# Altium PCB samrtmcu.PcbDoc
Units mm, origin at the board's own origin, x right, y up, seen from the top; angles counter-clockwise.
Board outline 50.28 x 49.91 mm, 4 copper layers (Top Layer, GND_layer, 3.3V_layer, Bottom Layer), stack 0.603 mm thick; 88 components, 43 nets, 255 pads, 84 vias.
Unrouted connection lines stored in the file: 4.
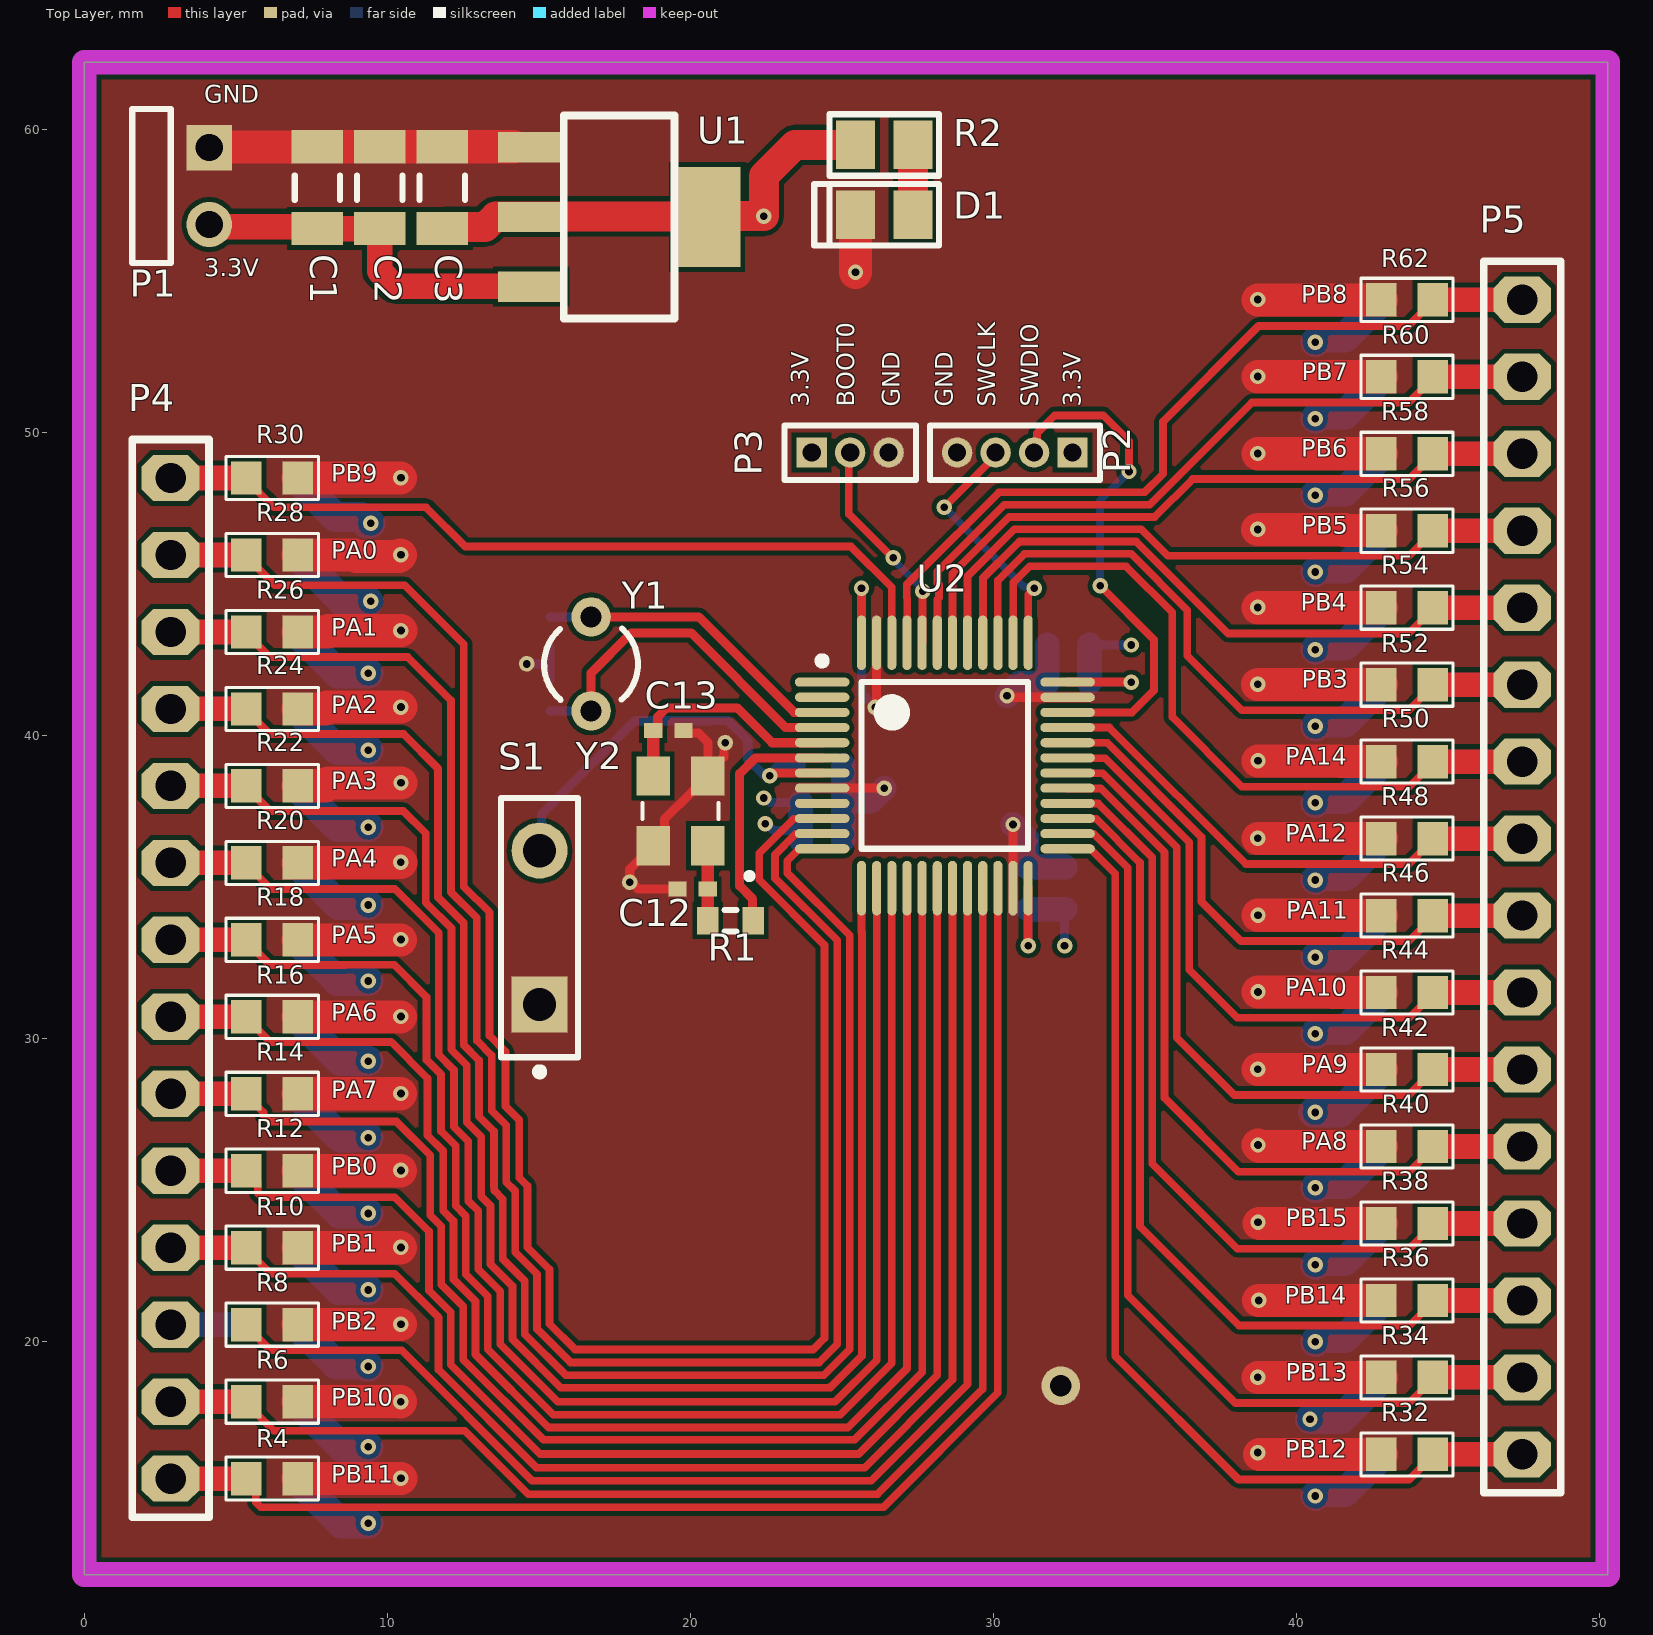
[diagram p0: Top Layer view]
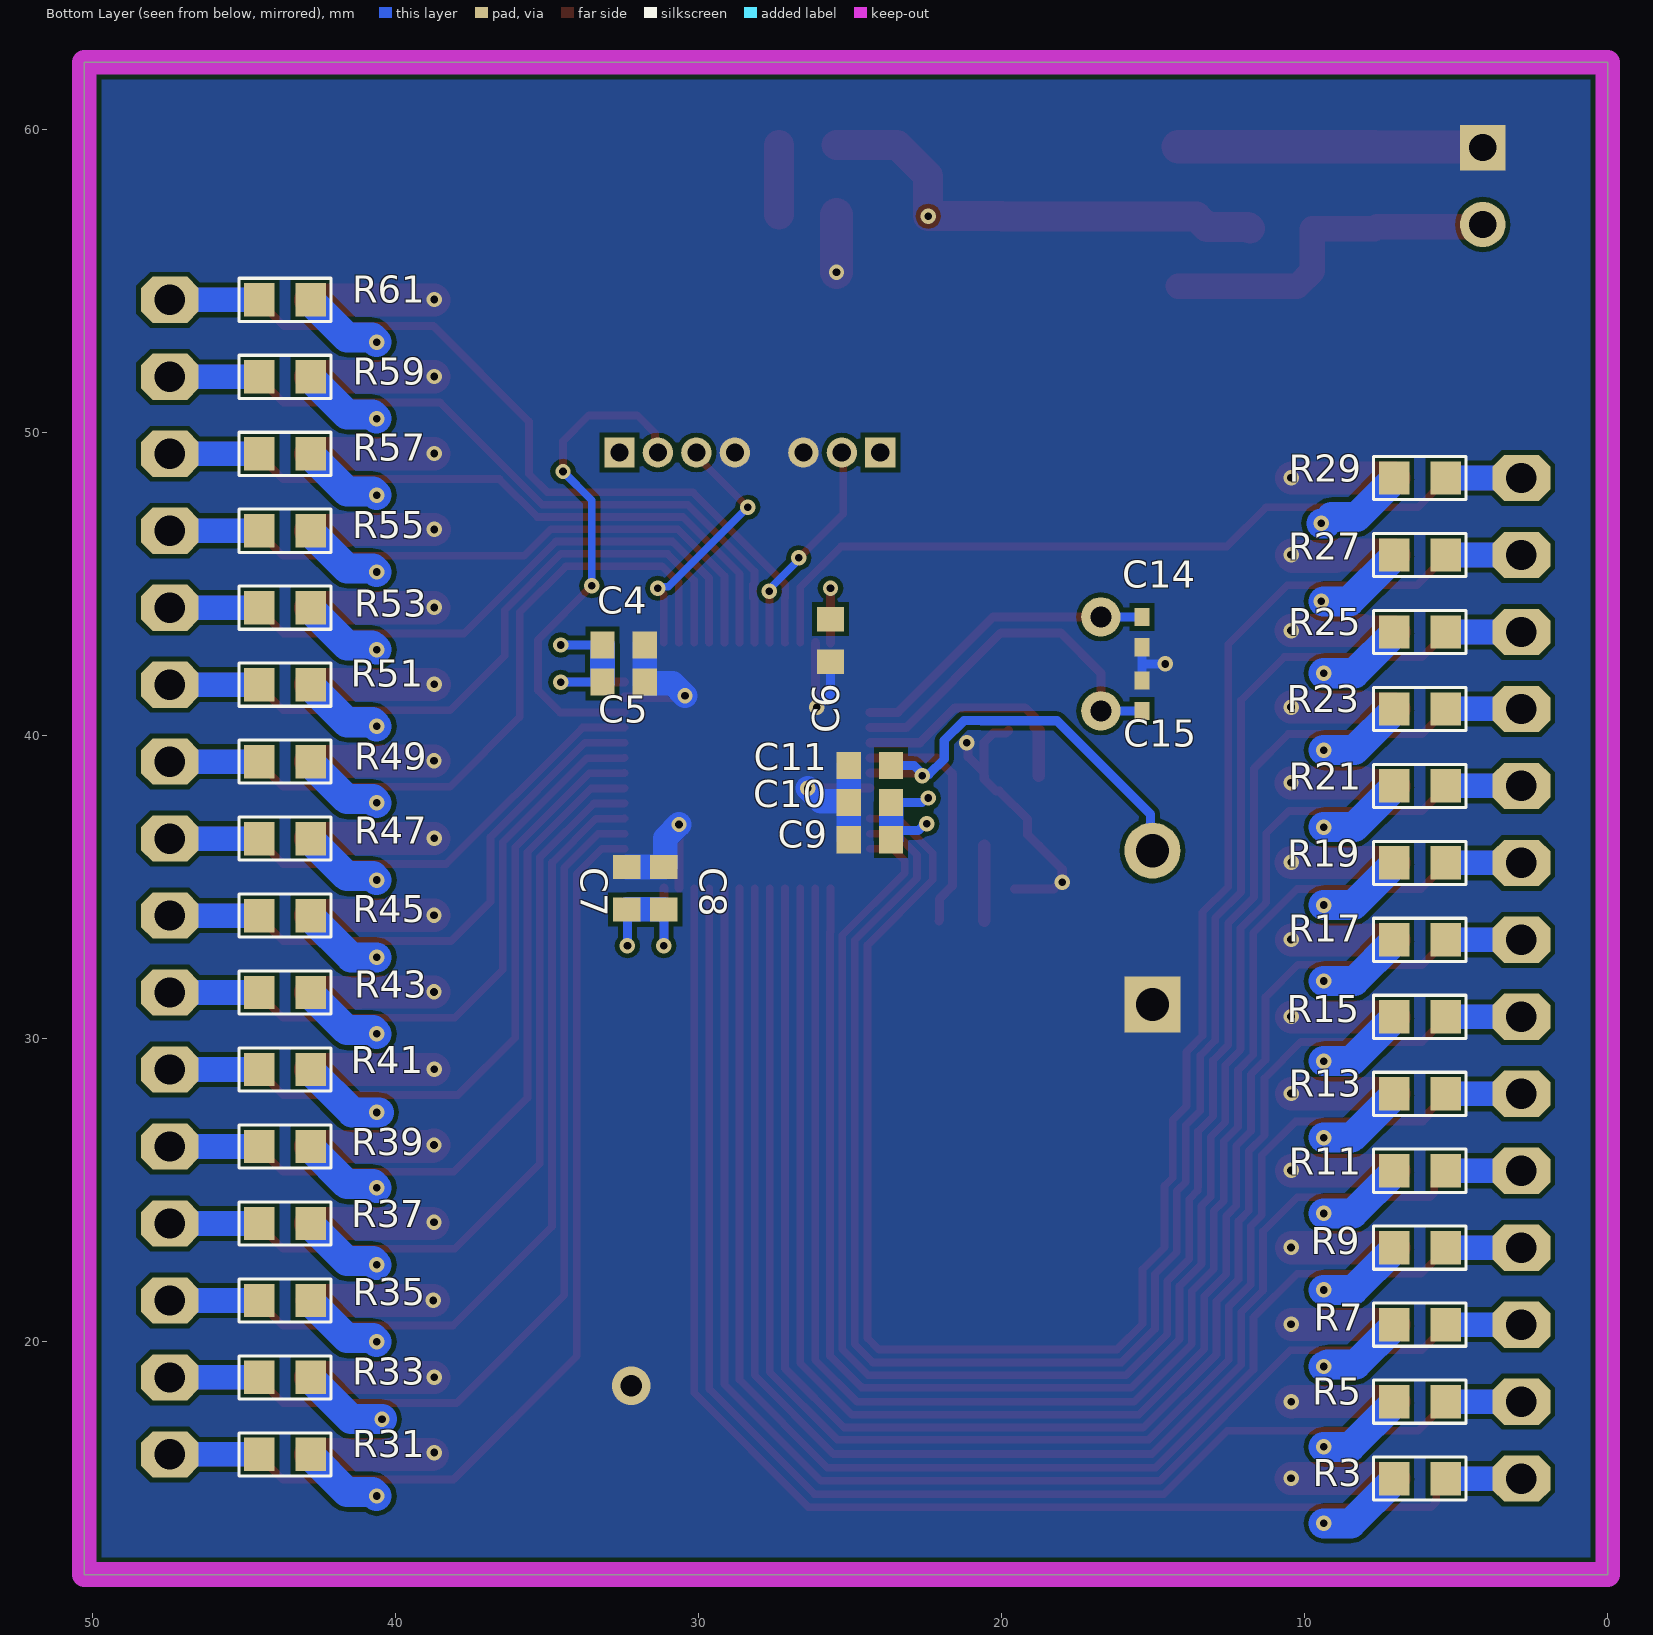
[diagram p1: Bottom Layer view, seen from below]
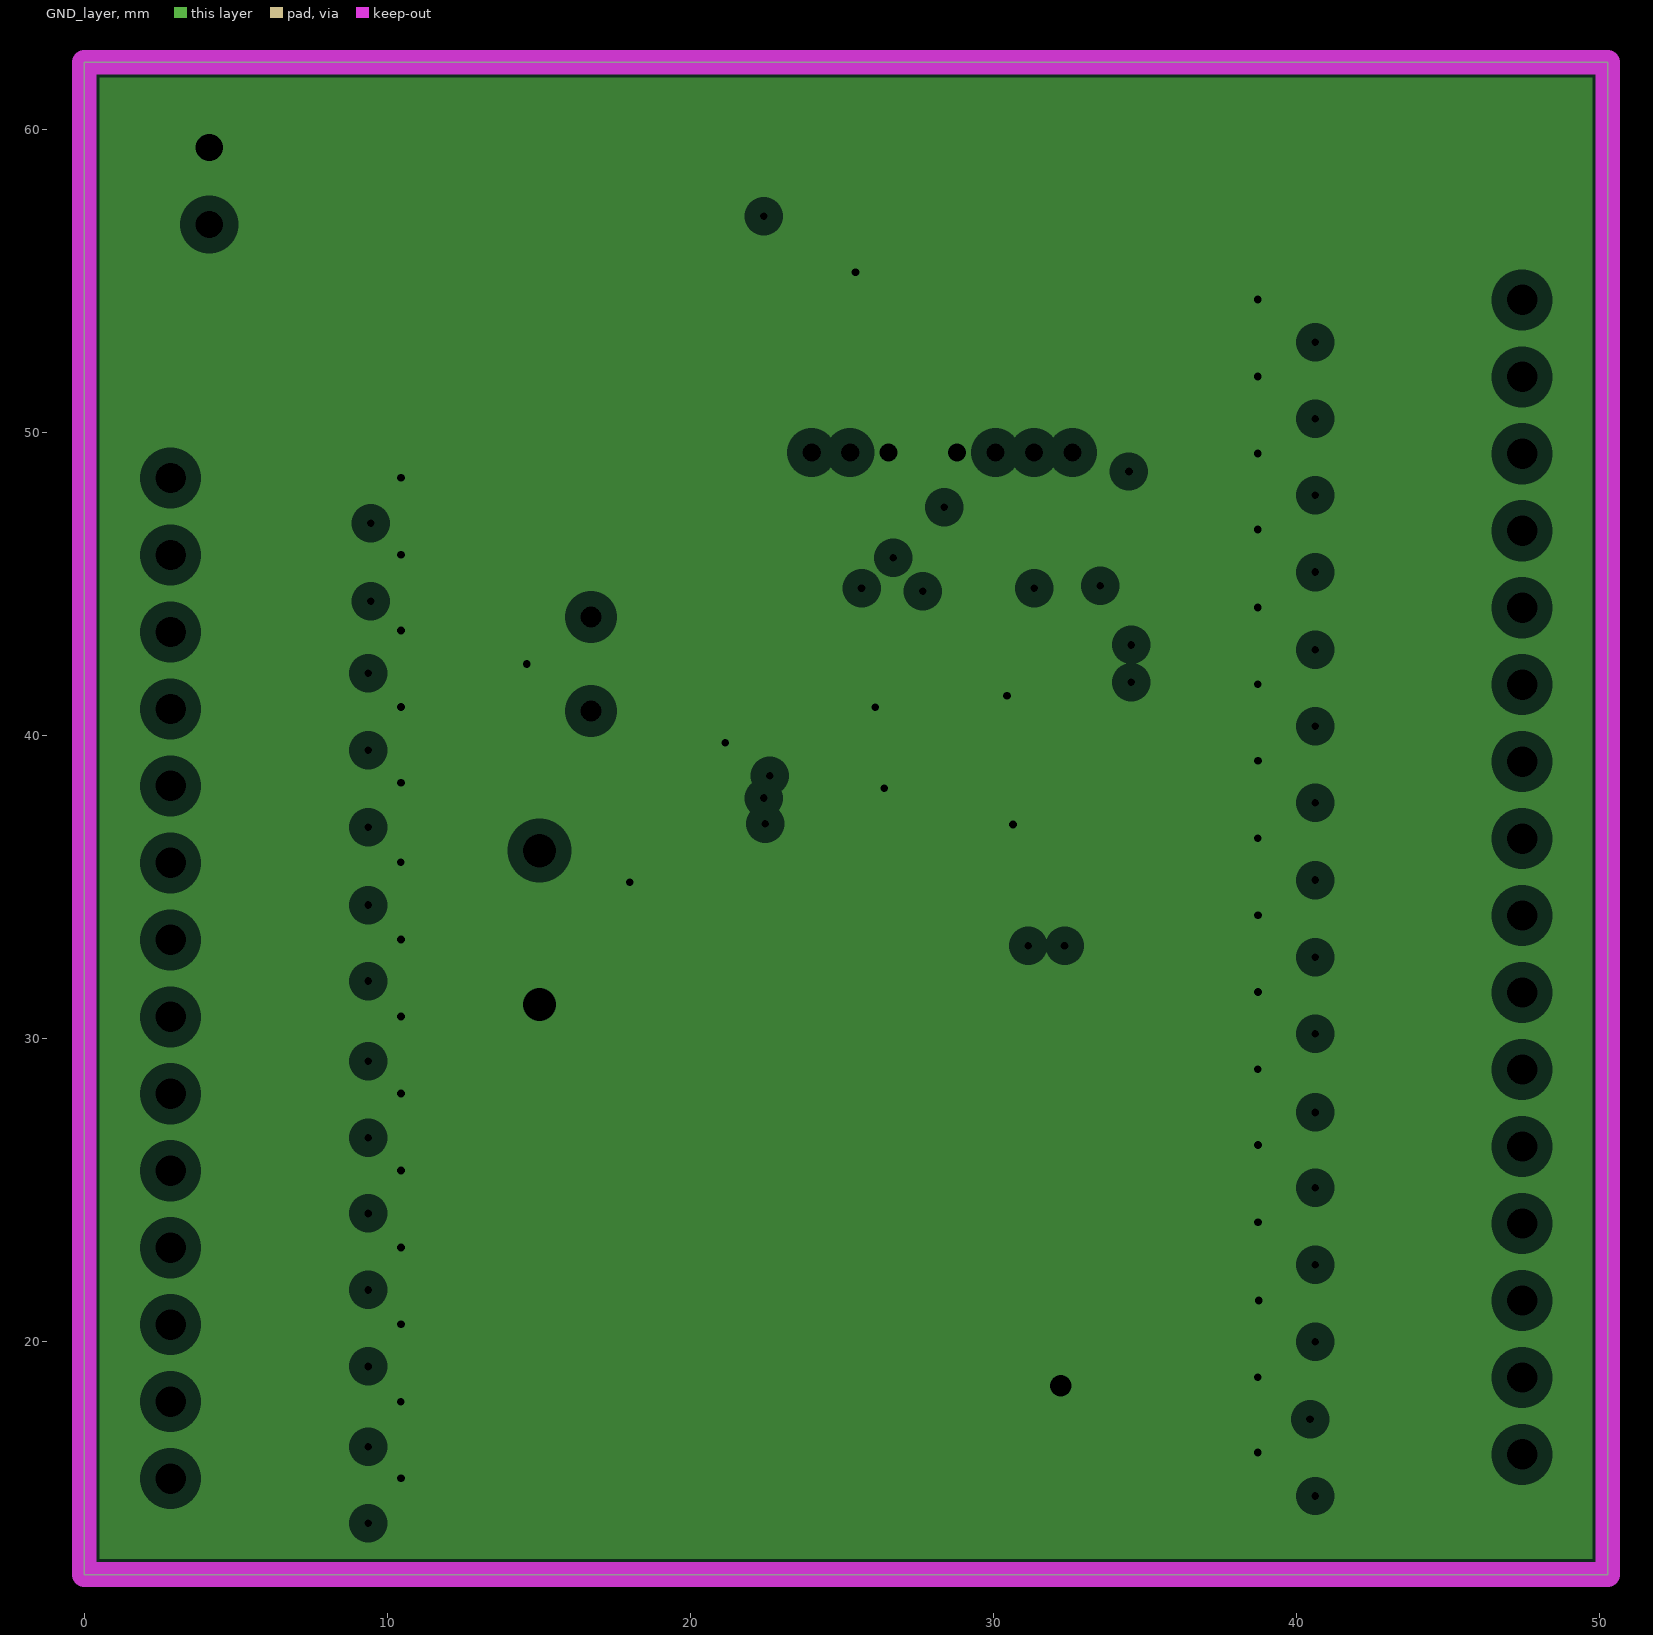
[diagram p2: GND_layer, clearances drawn from the general rule]
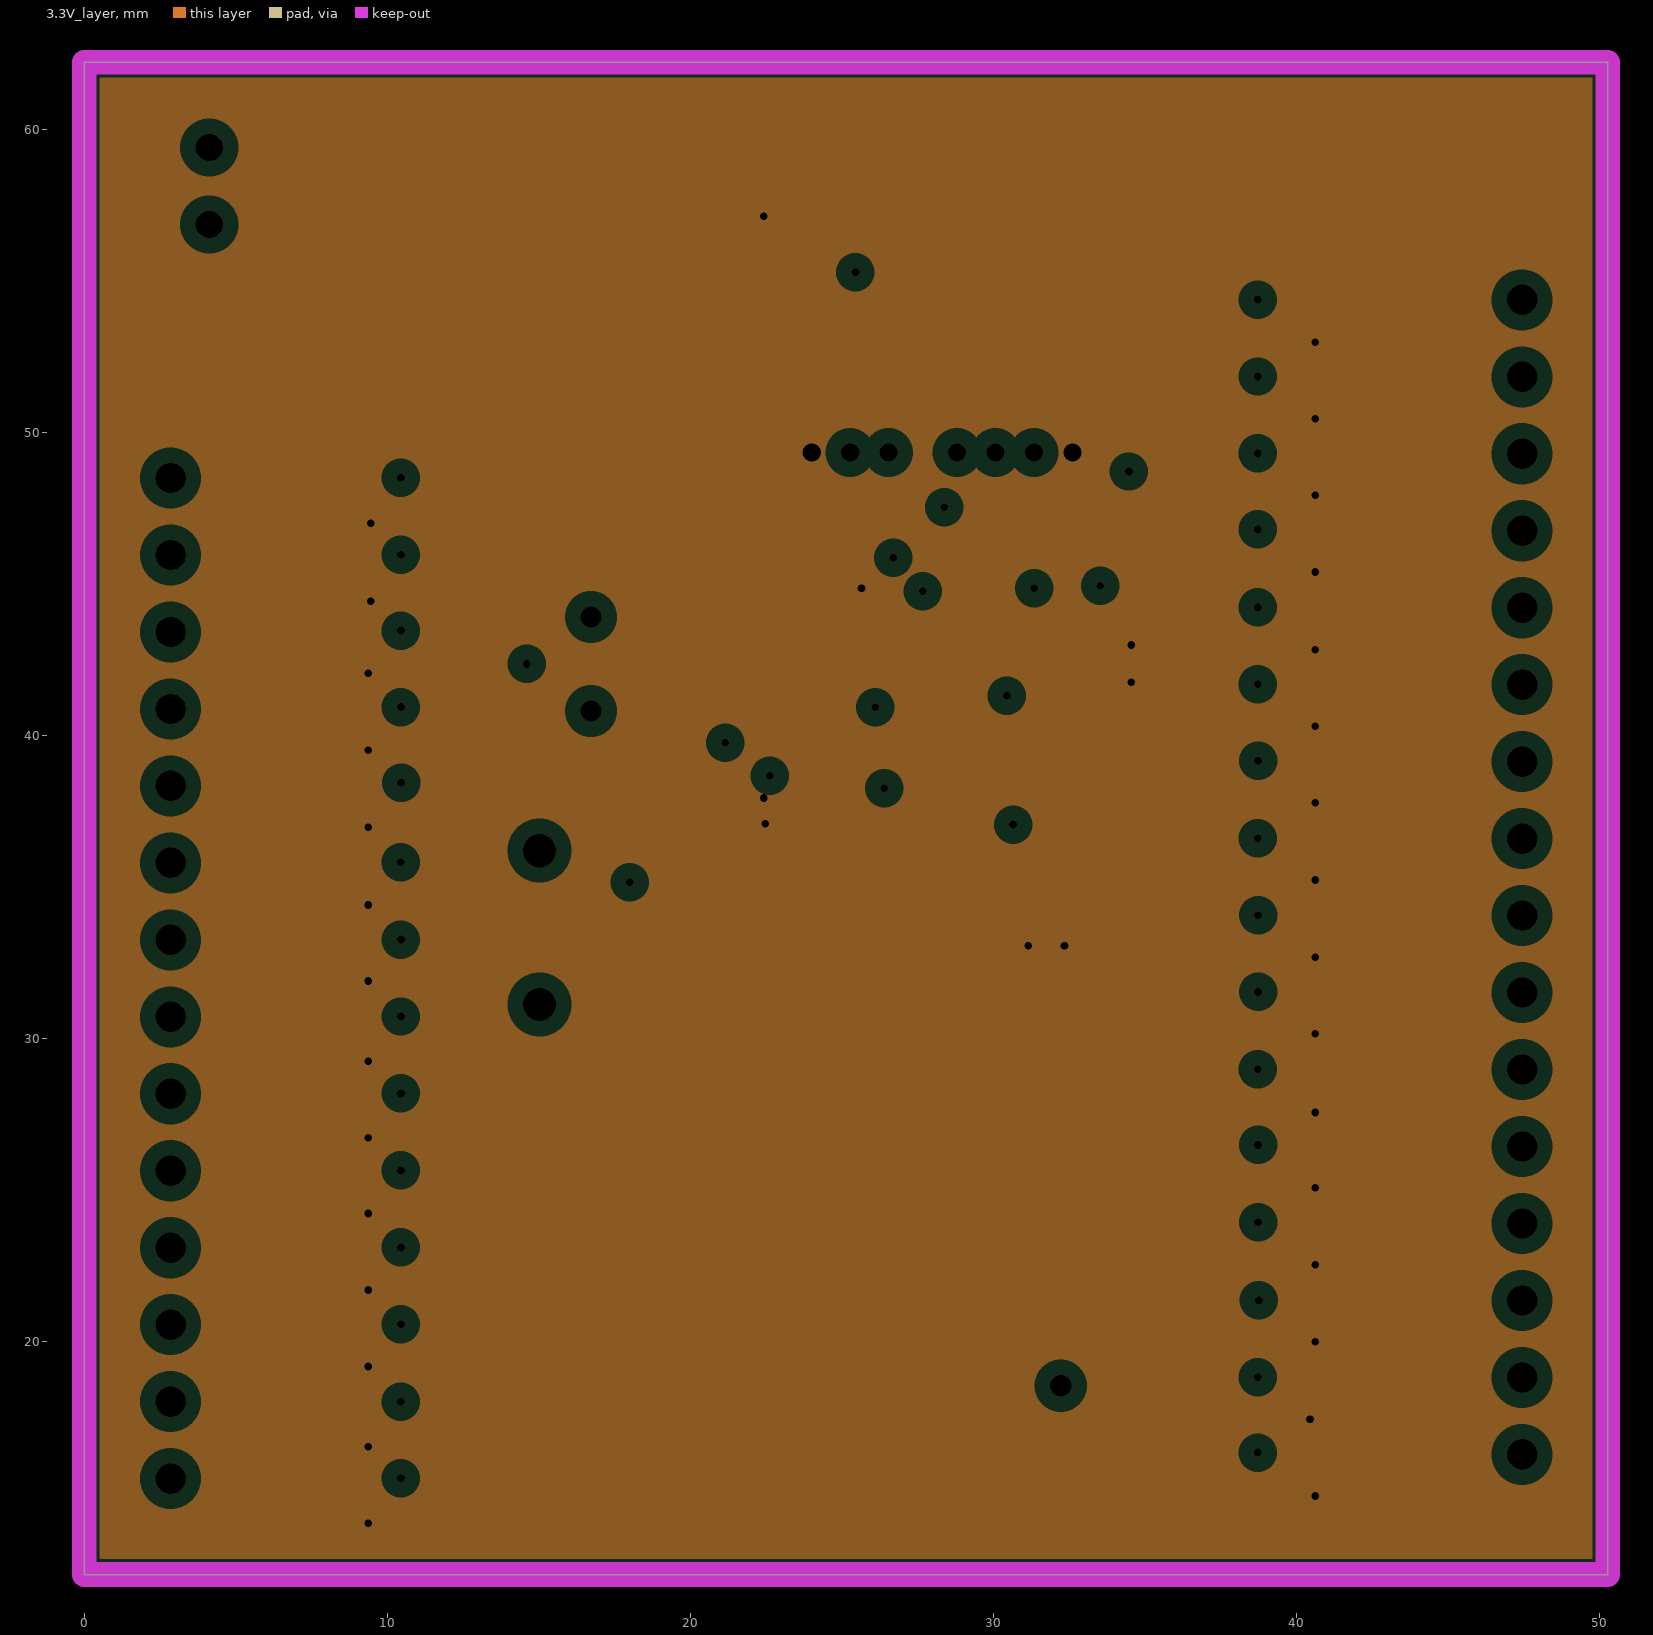
[diagram p3: 3.3V_layer, clearances drawn from the general rule]
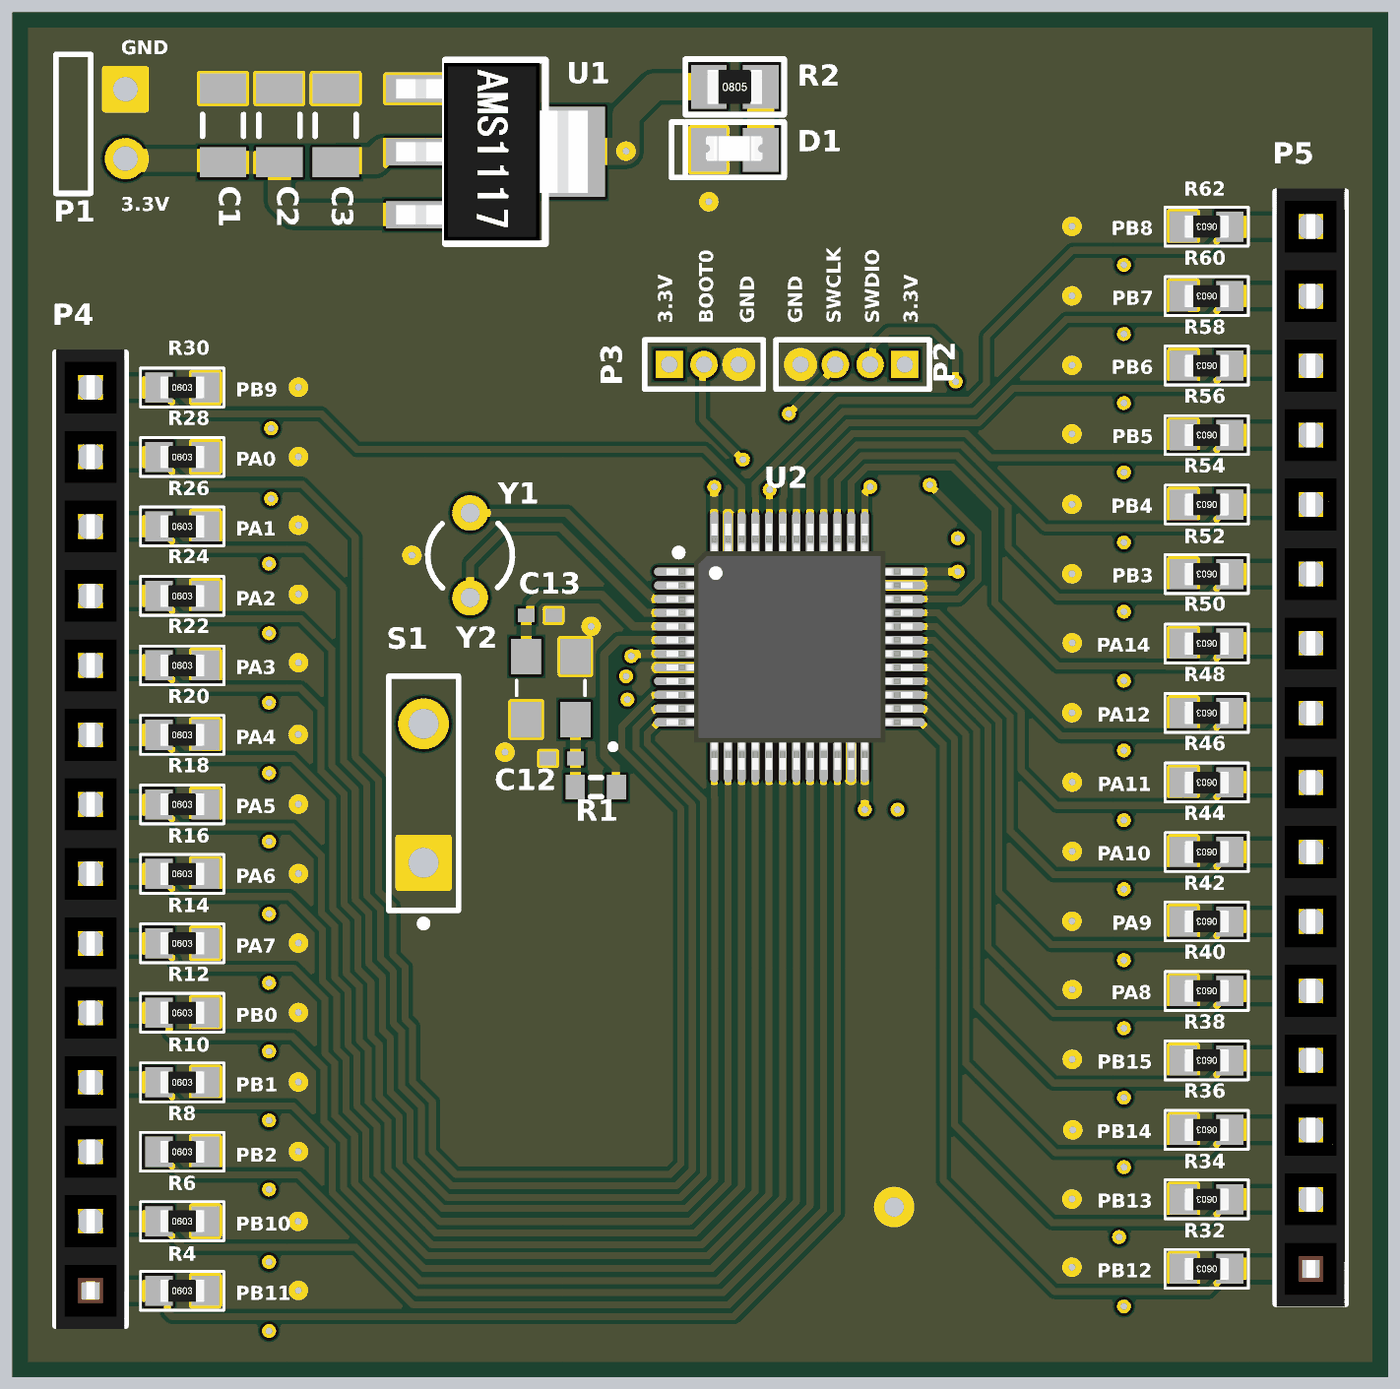
[diagram p4: 3D render of the assembled board from above, using the file's embedded part models]
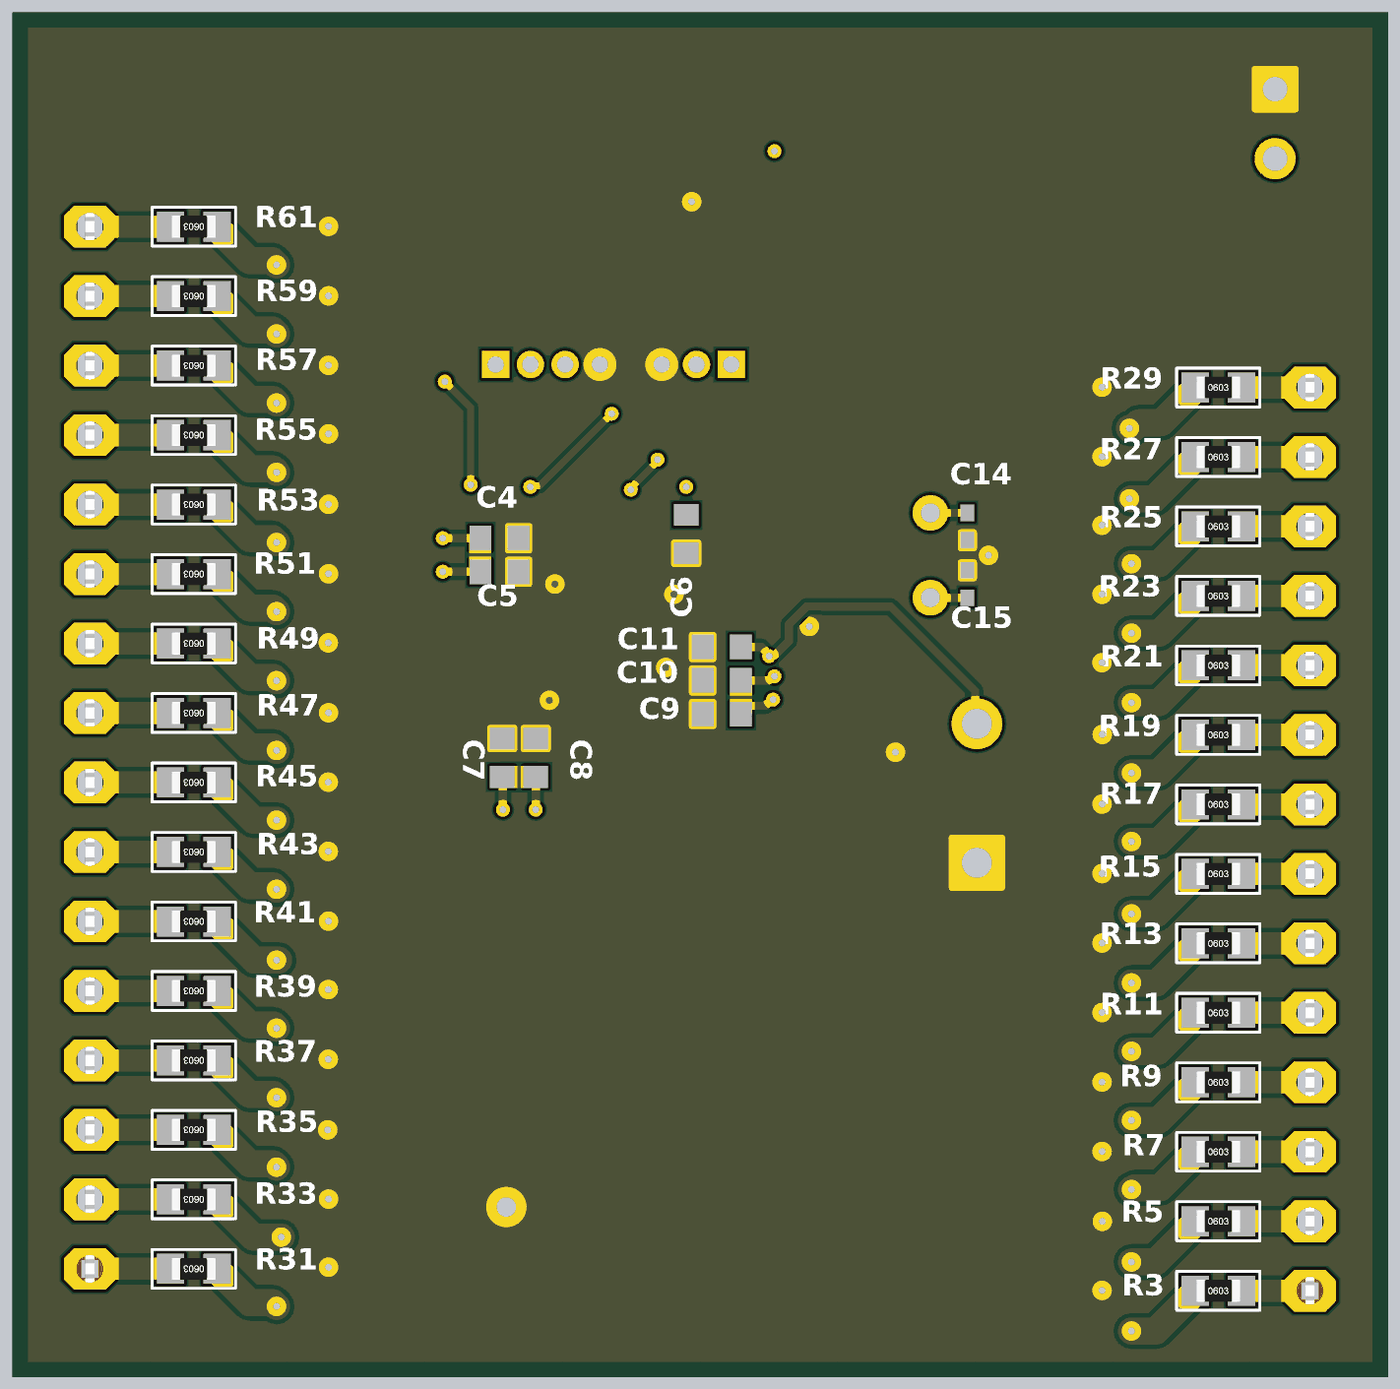
[diagram p5: 3D render of the assembled board from below, using the file's embedded part models]

## Layer stack, top to bottom
Top Solder: solder mask 0.0102, Solder Resist, Dk 3.5
Top Layer: signal copper 0.0356
Dielectric 2: prepreg 0.0711, PP-006, Dk 4.1
GND_layer: plane copper 0.035, net GND
Dielectric 1: dielectric 0.32, FR-4, Dk 4.8
3.3V_layer: plane copper 0.035, net +3.3V
Dielectric 3: prepreg 0.0711, PP-006, Dk 4.1
Bottom Layer: signal copper 0.0356
Bottom Solder: solder mask 0.0102, Solder Resist, Dk 3.5

## Board outline
0,12.325 0,62.23 50.275,62.23 50.275,12.325

## Design rules (kind name [scope] priority, off if disabled: settings)
Clearance [All] p1: gap=0.152 ignorepadtopadclearanceinfootprint=FALSE
ComponentClearance IGNORE [InComponent('Y2') vs InComponent('C12')] p1: gap=0.254 collisioncheckmode=3 verticalgap=0.254 showdistances=FALSE donotcheckwithout3dbody=TRUE
ComponentClearance ComponentClearance_1 [All] p2: gap=0.254 collisioncheckmode=3 verticalgap=0.254 showdistances=FALSE
MinimumSolderMaskSliver [All] p1: minsoldermaskwidth=0.051
PlaneClearance [All] p1: clearance=0.508
PlaneConnect [All] p1: planeconnectstyle=Direct reliefexpansion=0.508 reliefentries=4 reliefconductorwidth=0.254 reliefairgap=0.254
PolygonConnect [All] p1: connectstyle=Direct reliefconductorwidth=0.254 reliefentries=4 polygonreliefangle="90 Angle" airgapwidth=0.254
RoutingVias [All] p1: holewidth=0.254 width=0.508 viastyle="Through Hole" minholewidth=0.254 minwidth=0.508 maxholewidth=0.711 maxwidth=1.27
SilkToSilkClearance [All] p1: silktosilkclearance=0.102
SilkToSolderMaskClearance [IsPad] p1: minsilkscreentomaskgap=0.051 clearancetoexposedcopper=TRUE
SolderMaskExpansion [All] p1: expansion=0.102 istentingtop=FALSE
Width [All] p1: maxlimit=1.092 minlimit=0.254 preferedwidth=0.254
24 further rules are at their usual default settings.

## Classes and differential pairs
component class MCU: C4 C5 C6 C7 C8 C9 C10 C11 C12 C13 C14 C15 P2 P3 P4 P5 R1 R3 R4 R5 R6 R7 R8 R9 R10 R11 R12 R13 R14 R15 R16 R17 R18 R19 R20 R21 R22 R23 R24 R25 R26 R27 R28 R29 R30 R31 R32 R33 R34 R35 R36 R37 R38 R39 R40 R41 R42 R43 R44 R45 R46 R47 R48 R49 R50 R51 R52 R53 R54 R55 R56 R57 R58 R59 R60 R61 R62 S1 U2 Y1 Y2
component class PowerSupply: C1 C2 C3 D1 gg P1 R2 U1

## Components (designator, comment, footprint, x,y, rotation, side; value= is the part's Value field where it differs from the comment)
C1 "Cap Semi" C1206 7.696,58.091 r270 top value=100nF
C2 "tantalum cap" C1206 9.753,58.091 r270 top value=10uF
C3 "tantalum cap" C1206 11.81,58.091 r270 top value=100uF
C4 "" 1608[0603] 32.475,43 r0 bottom value=100nF
C5 "Cap Semi" 1608[0603] 32.475,41.775 r0 bottom value=100nF
C6 "Cap Semi" 1608[0603] 25.65,43.15 r90 bottom value=100nF
C7 "Cap Semi" 1608[0603] 32.375,34.975 r270 bottom value=100nF
C8 "Cap Semi" 1608[0603] 31.15,34.975 r270 bottom value=4.7uF
C9 "Cap Semi" 1608[0603] 24.35,36.575 r180 bottom value=10nF
C10 "Cap Semi" 1608[0603] 24.35,37.8 r180 bottom value=1uF
C11 "Cap Semi" 1608[0603] 24.35,39.025 r180 bottom value=100nF
C12 "Cap Semi" 0402 20.075,34.95 r0 top value=10pF
C13 "Cap Semi" 0402 19.275,40.175 r180 top value=10pF
C14 "Cap Semi" 0402 15.375,43.425 r90 bottom value=10pF
C15 "Cap Semi" 0402 15.375,41.325 r270 bottom value=10pF
D1 "LED" MY_LED_0805 26.4,57.275 r0 top
P1 "Battery connection 9V" HDR1X2H 4.125,59.415 r270 top
P2 "MHDR1X4" MHDR1X4 32.615,49.35 r180 top
P3 "MHDR1X3" MHDR1X3 24.005,49.35 r0 top
P4 "Header 14" MY_FE14 2.85,32 r90 top
P5 "Header 16" MY_FE16 47.45,35.34 r90 top
R1 "Res3" J1-0603 21.325,33.9 r0 top value=10R
R2 "1K" MY_0805 26.4,59.5 r0 top
R3 "1K" MY_0603 6.2,15.49 r180 bottom
R4 "1K" MY_0603 6.2,15.49 r0 top
R5 "1K" MY_0603 6.2,18.03 r180 bottom
R6 "1K" MY_0603 6.2,18.03 r0 top
R7 "1K" MY_0603 6.2,20.57 r180 bottom
R8 "1K" MY_0603 6.2,20.57 r0 top
R9 "1K" MY_0603 6.2,23.11 r180 bottom
R10 "1K" MY_0603 6.2,23.11 r0 top
R11 "1K" MY_0603 6.2,25.65 r180 bottom
R12 "1K" MY_0603 6.2,25.65 r0 top
R13 "1K" MY_0603 6.2,28.19 r180 bottom
R14 "1K" MY_0603 6.2,28.19 r0 top
R15 "1K" MY_0603 6.2,30.73 r180 bottom
R16 "1K" MY_0603 6.2,30.73 r0 top
R17 "1K" MY_0603 6.2,33.27 r180 bottom
R18 "1K" MY_0603 6.2,33.27 r0 top
R19 "1K" MY_0603 6.2,35.81 r180 bottom
R20 "1K" MY_0603 6.2,35.81 r0 top
R21 "1K" MY_0603 6.2,38.35 r180 bottom
R22 "1K" MY_0603 6.2,38.35 r0 top
R23 "1K" MY_0603 6.2,40.89 r180 bottom
R24 "1K" MY_0603 6.2,40.89 r0 top
R25 "1K" MY_0603 6.2,43.43 r180 bottom
R26 "1K" MY_0603 6.2,43.43 r0 top
R27 "1K" MY_0603 6.2,45.97 r180 bottom
R28 "1K" MY_0603 6.2,45.97 r0 top
R29 "1K" MY_0603 6.2,48.51 r180 bottom
R30 "1K" MY_0603 6.2,48.51 r0 top
R31 "1K" MY_0603 43.65,16.29 r0 bottom
R32 "1K" MY_0603 43.65,16.29 r180 top
R33 "1K" MY_0603 43.65,18.83 r0 bottom
R34 "1K" MY_0603 43.65,18.83 r180 top
R35 "1K" MY_0603 43.65,21.37 r0 bottom
R36 "1K" MY_0603 43.65,21.37 r180 top
R37 "1K" MY_0603 43.65,23.91 r0 bottom
R38 "1K" MY_0603 43.65,23.91 r180 top
R39 "1K" MY_0603 43.65,26.45 r0 bottom
R40 "1K" MY_0603 43.65,26.45 r180 top
R41 "1K" MY_0603 43.65,28.99 r0 bottom
R42 "1K" MY_0603 43.65,28.99 r180 top
R43 "1K" MY_0603 43.65,31.53 r0 bottom
R44 "1K" MY_0603 43.65,31.53 r180 top
R45 "1K" MY_0603 43.65,34.07 r0 bottom
R46 "1K" MY_0603 43.65,34.07 r180 top
R47 "1K" MY_0603 43.65,36.61 r0 bottom
R48 "1K" MY_0603 43.65,36.61 r180 top
R49 "1K" MY_0603 43.65,39.15 r0 bottom
R50 "1K" MY_0603 43.65,39.15 r180 top
R51 "1K" MY_0603 43.65,41.69 r0 bottom
R52 "1K" MY_0603 43.65,41.69 r180 top
R53 "1K" MY_0603 43.65,44.23 r0 bottom
R54 "1K" MY_0603 43.65,44.23 r180 top
R55 "1K" MY_0603 43.65,46.77 r0 bottom
R56 "1K" MY_0603 43.65,46.77 r180 top
R57 "1K" MY_0603 43.65,49.31 r0 bottom
R58 "1K" MY_0603 43.65,49.31 r180 top
R59 "1K" MY_0603 43.65,51.85 r0 bottom
R60 "1K" MY_0603 43.65,51.85 r180 top
R61 "1K" MY_0603 43.65,54.39 r0 bottom
R62 "1K" MY_0603 43.65,54.39 r180 top
S1 "SW-PB" SPST-2 15.025,33.675 r90 top
U1 "" "4-Pin SOT" 17.65,53.775 r270 top
U2 "" STM-LQFP48_N 28.4,39.025 r0 top
Y1 "XTAL" R38 16.725,42.375 r0 top
Y2 "ECS-80-12-33-JGN-TR" XTAL_ECS-240-8-33-AGN-TR 19.675,37.525 r90 top

## Footprints (in the part's own frame and the unit in brackets; to place one, negate y for a bottom-side part, rotate by r counter-clockwise, add the part's x,y. Pads: shape width x height; smd on the part's side, far side on the other; paste and mask are expansions set on the pad)
"4-Pin SOT" [mm]
  rect 1x2.2 smd: 0(-1.05,-2.9) 1(-5.65,-2.9) 2(-3.35,-2.9)
  rect 3.3x2.2 smd: 2(-3.35,2.9)
  silkscreen extent -6.7,-1.83 0,1.83, body extent -6.6,-3.63 -0.1,3.37, height 1.61
0402 [mm] "Chip Capacitor, Body 1.0x0.5mm, IPC High Density"
  rect 0.6x0.5 smd: 1(-0.5,0) 2(0.5,0)
  body extent -0.55,-0.3 0.55,0.3, height 1.3
1608[0603] [mm] "Chip Capacitor, Body 1.6x0.8mm, IPC High Density"
  rect 0.8x0.9 smd: 1(-0.7,0) 2(0.7,0)
  body extent -0.87,-0.48 0.87,0.48, height 1.3
C1206 [mm] "Chip Capacitor, Body 3.2x1.6mm, IPC High Density"
  rect 1.1x1.7 smd: 1(-1.35,0) 2(1.35,0)
  silkscreen extent -0.4,-0.75 0.4,0.75, body extent -1.7,-0.9 1.7,0.9, height 1.3
HDR1X2H [mm] "Connector; Header; 2 Position; Right Angle"
  rect 1.5x1.5 hole 0.9: 1(0,0)
  round 1.5 hole 0.9: 2(2.54,0)
  silkscreen extent -1.27,-2.54 3.81,-1.27
J1-0603 [mm] "Chip Resistor, Body 1.6x0.8mm, IPC High Density"
  rect 0.7x0.9 smd: 1(-0.75,0) 2(0.75,0)
  silkscreen extent -0.2,-0.35 0.2,0.35, body extent -0.85,-0.48 0.85,0.48, height 0.9
MHDR1X3 [mm] "Connector; Header; 3 Position"
  rect 1x1 hole 0.6: 1(0,0)
  round 1 hole 0.6: 2(1.27,0) 3(2.54,0)
  silkscreen extent -0.9,-0.9 3.44,0.9
MHDR1X4 [mm] "Connector; Header; 4 Position"
  rect 1x1 hole 0.6: 1(0,0)
  round 1 hole 0.6: 2(1.27,0) 3(2.54,0) 4(3.81,0)
  silkscreen extent -0.9,-0.9 4.71,0.9
MY_0603 [mm]
  rect 1x1.1 smd: 1(-0.85,0) 2(0.85,0)
  silkscreen extent -1.52,-0.71 1.52,0.71, body extent -0.8,-0.4 0.8,0.4, height 0.44
MY_0805 [mm]
  rect 1.3x1.6 smd: 1(-0.95,0) 2(0.95,0)
  silkscreen extent -1.8,-1.02 1.8,1.02, body extent -1,-0.62 1,0.63, height 0.59
MY_FE14 [mm]
  oct 1.524x1.905 hole 1: 1(-16.51,0) 2(-13.97,0) 3(-11.43,0) 4(-8.89,0) 5(-6.35,0) 6(-3.81,0) 7(-1.27,0) 8(1.27,0) 9(3.81,0) 10(6.35,0) 11(8.89,0) 12(11.43,0) 13(13.97,0) 14(16.51,0)
  silkscreen extent -17.78,-1.27 17.78,1.27, body extent -17.9,-1.25 17.91,1.25, height 8.5
MY_FE16 [mm]
  oct 1.524x1.905 hole 1: 1(-19.05,0) 2(-16.51,0) 3(-13.97,0) 4(-11.43,0) 5(-8.89,0) 6(-6.35,0) 7(-3.81,0) 8(-1.27,0) 9(1.27,0) 10(3.81,0) 11(6.35,0) 12(8.89,0) 13(11.43,0) 14(13.97,0) 15(16.51,0) 16(19.05,0)
  silkscreen extent -20.32,-1.27 20.32,1.27, body extent -20.44,-1.25 20.45,1.25, height 8.5
MY_LED_0805 [mm]
  rect 1.3x1.6 smd: A(0.95,-0.076) K(-0.95,-0.076)
  silkscreen extent -2.31,-1.09 1.8,0.94, body extent -1.06,-0.48 1.01,0.42, height 0.86
R38 [mm] "Crystal, Thru-Hole; 2 Leads; Body 3.1 x 8.2 mm (Dia.xH)"
  round 1.3 hole 0.7: 1(0,1.55) 2(0,-1.55)
  silkscreen extent -1.55,-1.19 1.55,1.17
SPST-2 [mm] "Switch; 2 Leads"
  rect 1.85x1.85 hole 1.1: 1(-2.54,0)
  round 1.85 hole 1.1: 2(2.54,0)
  silkscreen extent -4.89,-1.27 4.28,1.27
STM-LQFP48_N [mm]
  oval 1.8x0.3 smd: 1(-4.05,2.75) 2(-4.05,2.25) 3(-4.05,1.75) 4(-4.05,1.25) 5(-4.05,0.75) 6(-4.05,0.25) 7(-4.05,-0.25) 8(-4.05,-0.75) 9(-4.05,-1.25) 10(-4.05,-1.75) 11(-4.05,-2.25) 12(-4.05,-2.75) 25(4.05,-2.75) 26(4.05,-2.25) 27(4.05,-1.75) 28(4.05,-1.25) 29(4.05,-0.75) 30(4.05,-0.25) 31(4.05,0.25) 32(4.05,0.75) 33(4.05,1.25) 34(4.05,1.75) 35(4.05,2.25) 36(4.05,2.75)
  oval 0.3x1.8 smd: 13(-2.75,-4.05) 14(-2.25,-4.05) 15(-1.75,-4.05) 16(-1.25,-4.05) 17(-0.75,-4.05) 18(-0.25,-4.05) 19(0.25,-4.05) 20(0.75,-4.05) 21(1.25,-4.05) 22(1.75,-4.05) 23(2.25,-4.05) 24(2.75,-4.05) 37(2.75,4.05) 38(2.25,4.05) 39(1.75,4.05) 40(1.25,4.05) 41(0.75,4.05) 42(0.25,4.05) 43(-0.25,4.05) 44(-0.75,4.05) 45(-1.25,4.05) 46(-1.75,4.05) 47(-2.25,4.05) 48(-2.75,4.05)
  silkscreen extent -4.17,-2.75 2.75,3.57, body extent -4.5,-4.5 4.5,4.5, height 1.56
XTAL_ECS-240-8-33-AGN-TR [mm]
  rect 1.3x1.1 smd: 1(-1.15,-0.9) 2(1.15,-0.9) 3(1.15,0.9) 4(-1.15,0.9)
  silkscreen extent -2.25,-2.37 0.27,1.25

## Part data
C1 C5 C6 C7 C8 C9 C10 C11 C12 C13 C14 C15: "Capacitor (Semiconductor SIM Model)", LatestRevisionDate=29-May-2009, LatestRevisionNote="IPC-7351 Footprint Added.", PackageDescription="Chip Capacitor", PackageReference=C1206, Published=8-Jun-2000, Publisher="Altium Limited"
C2 C3 C4: library part "Cap Semi", "Capacitor (Semiconductor SIM Model)", LatestRevisionDate=29-May-2009, LatestRevisionNote="IPC-7351 Footprint Added.", PackageDescription="Chip Capacitor", PackageReference=C1206, Published=8-Jun-2000, Publisher="Altium Limited"
D1: "Typical INFRARED GaAs LED", ASiD Part Number=LED-AS
P1: library part "Header 2H", "Header, 2-Pin, Right Angle", Voltage=9V, LatestRevisionDate=17-Jul-2002, LatestRevisionNote="Re-released for DXP Platform.", Publisher="Altium Limited"
P2: "Header, 4-Pin", LatestRevisionDate=17-Jul-2002, LatestRevisionNote="Re-released for DXP Platform.", Publisher="Altium Limited"
P3: "Header, 3-Pin", LatestRevisionDate=17-Jul-2002, LatestRevisionNote="Re-released for DXP Platform.", Publisher="Altium Limited"
P4: "Header, 14-Pin", ASiD Part Number="Header 14-AS"
P5: "Header, 16-Pin", ASiD Part Number="Header 16-AS"
R1: "Resistor", LatestRevisionDate=29-May-2009, LatestRevisionNote="IPC-7351 Footprint Added.", PackageDescription="Chip Resistor", PackageReference=J1-0603, Published=8-Jun-2000, Publisher="Altium Limited"
R2 R3 R4 R5 R6 R7 R8 R9 R10 R11 R12 R13 R14 R15 R16 R17 R18 R19 R20 R21 R22 R23 R24 R25 R26 R27 R28 R29 R30 R31 R32 R33 R34 R35 R36 R37 R38 R39 R40 R41 R42 R43 R44 R45 R46 R47 R48 R49 R50 R51 R52 R53 R54 R55 R56 R57 R58 R59 R60 R61 R62: library part Res, "Standard resistor", ASiD Part Number=Res-AS
S1: "Switch", LatestRevisionDate=17-Jul-2002, LatestRevisionNote="Re-released for DXP Platform.", PackageDescription="Switch; 2 Leads", PackageReference=SPST-2, Published=24-Mar-1999, Publisher="Altium Limited"
U1: library part LM1117, "The LM1117 is a low dropout voltage regulator with a / dropout of 1.2 V at 800 mA of load current", output voltage=3.3V, ComponentLink1Description=datasheet, ComponentLink1URL=https://www.ti.com/lit/gpn/LM1117
U2: library part STM32F103C8T6, "ARM Cortex-M3 32-bit MCU, 64 KB Flash, 20 KB Internal RAM, 37 I/Os, 48-pin LQFP, -40 to 85 degC, Tray", I/Os (High Current)=37, Operating Frequency(F) (Processor speed) (MHz)=72, Supplier Part Number 1=497-6063-ND, Supply Voltage(Vcc) min (V)=2, A/D Converter="2x12-bit (10 Channel)", ComponentLink1Description="Manufacturer URL", ComponentLink1URL=http://www.st.com/web/en/home.html, ComponentLink2Description=Datasheet, ComponentLink2URL=http://www.st.com/st-web-ui/static/active/en/resource/technical/document/datasheet/CD00161566.pdf, ComponentLink3Description="Package Specification", ComponentLink3URL=http://www.st.com/st-web-ui/static/active/en/resource/technical/document/datasheet/DM00058181.pdf, Core="ARM Cortex-M3", DatasheetVersion="Rev. 16", FLASH Size (Prog) (kB)=64, Internal RAM Size (kB)=20, Mounting Technology="Surface Mount", PackageDescription="48-Pin Low Profile Quad Flat Package, 7 x 7 mm Body, 0.5 mm Pitch", PackageReference=LQFP48, PackageVersion="Rev. 6, 06/2013", Packing=Tray, PartNumber=STM32F103C8T6, Supplier 1=Digi-Key, Supplier 2=Farnell, Supplier 3=Newark, Supplier 4=Newark, Supplier 5=Mouser, Supplier Part Number 2=1447637, Supplier Part Number 3=59M2182, Supplier Part Number 4=57P1222, Supplier Part Number 5=511-STM32F103C8T6
Y1: "Crystal Oscillator", LatestRevisionDate=17-Jul-2002, LatestRevisionNote="Re-released for DXP Platform.", PackageDescription="Crystal, Thru-Hole; 2 Leads; Body 3.1 x 8.2 mm (Dia.xH)", PackageReference=R38, Published=8-Jun-2000, Publisher="Altium Limited"
Y2: "8MHz Â±20ppm Crystal 12pF 400 Ohms 4-SMD, No Lead", Package="SMD-4 ECS International", Availability=Warning, BuyPart=https://www.snapeda.com/parts/ECS-80-12-33-JGN-TR/ECS%20Inc./view-part/4477300/?ref=eda, MF="ECS Inc.", Mouser-Purchase-URL=https://snapeda.com/shop?store=Mouser&id=4477300, MP=ECS-80-12-33-JGN-TR, Price=None, SnapEDA_Link=https://www.snapeda.com/parts/ECS-80-12-33-JGN-TR/ECS%20Inc./view-part/4477300/?ref=snap

## Via types
v1: diameter 0.508, hole 0.254, Top Layer to Bottom Layer, 83 vias
v2: diameter 1.27, hole 0.711, Top Layer to Bottom Layer, 1 vias

## Nets (pads, with @x,y where several pads share a name; then routed paths per layer and width w, separated by ;. In a path a pad name is that pad's centre, name@x,y a point inside that pad or via, vN(x,y) a via of type N, cw(c..) or ccw(c..) an arc to the next point about the centre after c; other vN are vias at no path point)
32KHz_01: C14.2 U2.3 Y1.1 | length 10.3
  Top Layer w0.3: Y1.1 20.275,43.925 23.425,40.775 U2.3
  Bottom Layer w0.3: C14.2 Y1.1
32KHz_02: C15.2 U2.4 Y1.2 | length 12.1
  Top Layer w0.3: Y1.2 16.725,42.075 18.05,43.4 20.025,43.4 23.15,40.275 U2.4
  Bottom Layer w0.3: C15.2 Y1.2
+3.3V: C3.2 C4.2 C5.2 C6.2 C7.2 C8.2 C9.2 C10.2 P2.1 P3.1 R2.1 R3.1 R5.1 R7.1 R9.1 R11.1 R13.1 R15.1 R17.1 R19.1 R21.1 R23.1 R25.1 R27.1 R29.1 R31.1 R33.1 R35.1 R37.1 R39.1 R41.1 R43.1 R45.1 R47.1 R49.1 R51.1 R53.1 R55.1 R57.1 R59.1 R61.1 U1.2 U2.9 U2.24 U2.36 U2.48 | length 117.5
  Top Layer w0.3: U2.48 v1(25.65,44.875) ; v1(31.15,33.075) U2.24 ; U2.36 v1@34.575,41.775
  Top Layer w0.991: C3.2 11.865,56.796 13.23,56.796 13.575,57.141 19.975,57.141 19.984,57.15 v1(22.425,57.15) 22.425,58.475 23.45,59.5 R2.1
  Bottom Layer w0.3: v1(22.425,37.95) 22.481,37.95 22.631,37.8 C10.2 ; v1(22.475,37.1) 22.531,37.1 22.756,36.875 23.4,36.875 23.65,36.625 C9.2 ; v1(31.15,33.075) C8.2 ; v1(32.35,33.075) 32.35,34.25 C7.2 ; C5.2 v1@34.575,41.775 ; C4.2 v1(34.55,43)
  Bottom Layer w0.813: C9.2 C10.2 ; C8.2 C7.2 ; C5.2 C4.2
  Bottom Layer w0.991: R3.1 7.05,15.44 8.473,14.017 v1(9.375,14.017) ; R5.1@7.05,17.98 8.488,16.542 v1(9.375,16.542) ; R7.1@7.05,20.52 8.315,19.255 9.247,19.255 9.31,19.192 v1(9.375,19.192) ; R9.1@7.05,23.06 8.393,21.717 v1(9.375,21.717) ; R11.1@7.05,25.6 8.408,24.242 v1(9.375,24.242) ; R13.1@7.05,28.14 8.448,26.742 v1(9.375,26.742) ; R15.1@7.05,30.68 8.463,29.267 v1(9.375,29.267) ; R17.1@7.05,33.22 8.359,31.911 v1(9.375,31.911) ; R19.1@7.05,35.76 8.393,34.417 v1(9.375,34.417) ; R21.1@7.05,38.3 8.363,36.987 v1(9.375,36.987) ; R23.1@7.05,40.84 8.363,39.527 v1(9.375,39.527) ; R25.1@7.05,43.38 8.363,42.067 v1(9.375,42.067) ; R27.1@7.05,45.92 8.528,44.442 v1@9.375,44.442 ; R29.1@7.05,48.46 8.29,47.22 9.111,47.22 9.314,47.017 v1(9.45,47.017) ; v1(40.45,17.45) 41.47,17.45 R33.1@42.8,18.78 ; v1@40.55,27.575 41.435,27.575 R41.1@42.8,28.94 ; v1(40.625,14.917) 40.758,15.05 41.61,15.05 42.8,16.24 R31.1 ; v1(40.625,20.007) 40.748,20.13 41.61,20.13 R35.1@42.8,21.32 ; v1(40.625,22.547) 40.748,22.67 41.61,22.67 R37.1@42.8,23.86 ; v1(40.625,25.087) 40.748,25.21 41.61,25.21 R39.1@42.8,26.4 ; v1(40.625,30.167) 40.748,30.29 41.61,30.29 R43.1@42.8,31.48 ; v1(40.625,32.692) 41.472,32.692 42.8,34.02 R45.1 ; v1(40.625,35.242) 40.753,35.37 41.61,35.37 R47.1@42.8,36.56 ; v1(40.625,37.792) 40.743,37.91 41.61,37.91 R49.1@42.8,39.1 ; v1(40.625,40.317) 40.758,40.45 41.61,40.45 R51.1@42.8,41.64 ; v1(40.625,42.843) 40.772,42.99 41.61,42.99 R53.1@42.8,44.18 ; v1(40.625,45.407) 40.748,45.53 41.61,45.53 R55.1@42.8,46.72 ; v1(40.625,47.942) 40.753,48.07 41.61,48.07 R57.1@42.8,49.26 ; v1(40.625,50.467) 40.768,50.61 41.61,50.61 R59.1@42.8,51.8 ; v1(40.625,52.992) 40.783,53.15 41.61,53.15 R61.1@42.8,54.34
  other v1: 40.625,27.575 34.55,41.775 9.45,44.442
+9V: C1.2 C2.2 P1.2 U1.0 | length 11.7
  Top Layer w0.838: P1.2 4.192,56.808 7.629,56.808 C1.2 C2.2 9.753,55.332 10.244,54.841 U1.0@14.175,54.841
BOOT0: P3.2 U2.44 | length 7.3
  Top Layer w0.254: P3.2 25.225,49.3 25.225,47.325 26.675,45.875 v1(26.7,45.875) ; U2.44 27.659,43.084 27.659,44.759 v1(27.675,44.775)
  Bottom Layer w0.254: v1(26.7,45.875) 26.7,45.812 27.675,44.837 v1(27.675,44.775)
GND: C1.1 C2.1 C3.1 C4.1 C5.1 C6.1 C7.1 C8.1 C9.1 C10.1 C11.1 C12.1 C13.1 C14.1 C15.1 D1.K P1.1 P2.4 P3.3 R4.2 R6.2 R8.2 R10.2 R12.2 R14.2 R16.2 R18.2 R20.2 R22.2 R24.2 R26.2 R28.2 R30.2 R32.2 R34.2 R36.2 R38.2 R40.2 R42.2 R44.2 R46.2 R48.2 R50.2 R52.2 R54.2 R56.2 R58.2 R60.2 R62.2 S1.1 U1.1 U2.8 U2.23 U2.35 U2.47 Y2.2 Y2.4 | length 155.8
  Top Layer w0.3: C12.1 18.281,34.95 18.056,35.175 v1(18,35.175) 18,35.6 Y2.4 19.143,36.743 19.143,37.243 20.075,38.175 20.175,38.175 20.575,38.575 Y2.2 Y2.2@20.581,38.681 ; C13.1 19.861,40.089 20.276,40.089 20.581,39.784 Y2.2@20.581,38.681 ; v1(21.15,39.775) 21.11,39.735 21.11,39.31 20.581,38.781 Y2.2@20.581,38.681 ; U2.8 v1(26.4,38.275) ; v1(26.1,40.95) 26.1,41.006 26.15,41.056 U2.47 ; v1(30.45,41.325) 30.506,41.325 30.556,41.275 U2.35 ; U2.23 v1(30.65,37.075)
  Top Layer w1.092: P1.1 4.147,59.437 7.692,59.437 C1.1 C2.1 C3.1 U1.1@14.175,59.441 ; R4.2 10.44,15.49 v1(10.45,15.5) ; R6.2 10.436,18.03 v1(10.44,18.026) ; R8.2 v1@10.44,20.57 ; R10.2 v1@10.44,23.11 ; R12.2 v1@10.44,25.65 ; R14.2 v1@10.44,28.19 ; R16.2 v1@10.44,30.73 ; R18.2 v1@10.44,33.27 ; R20.2 7.054,35.814 7.933,35.814 7.945,35.826 v1(10.443,35.826) ; R22.2 7.054,38.354 7.947,38.354 8.044,38.45 v1(10.453,38.45) ; R24.2 7.054,40.894 7.952,40.894 8.009,40.95 v1(10.45,40.95) ; R26.2 7.054,43.434 8.02,43.434 8.062,43.476 v1(10.45,43.476) ; R28.2 8.925,45.97 8.98,45.914 10.384,45.914 v1@10.44,45.97 ; R30.2 9.055,48.51 9.055,48.511 10.439,48.511 v1@10.44,48.51 ; v1(25.45,55.3) D1.K ; v1(38.725,41.7) 38.735,41.69 R52.2 ; v1(38.725,46.813) 41.567,46.813 41.606,46.774 42.796,46.774 R56.2 ; v1@38.735,18.83 R34.2 ; v1(38.735,26.501) 38.786,26.45 R40.2 ; v1@38.735,28.99 R42.2 ; v1(38.735,31.55) 41.188,31.55 41.204,31.534 42.796,31.534 R44.2 ; v1(38.735,34.082) 41.188,34.082 41.196,34.074 42.796,34.074 R46.2 ; v1@38.735,36.61 R48.2 ; v1(38.735,39.175) 41.448,39.175 41.47,39.154 42.796,39.154 R50.2 ; v1@38.735,44.23 R54.2 ; v1@38.735,49.31 R58.2 ; v1@38.735,51.85 R60.2 ; v1@38.735,54.39 R62.2 ; v1(38.755,21.37) R36.2@42.754,21.37 ; v1@38.776,23.91 R38.2 ; v1@38.785,16.29 R32.2
  Bottom Layer w0.3: v1(14.6,42.375) 15.375,42.375 ; C15.1 15.375,42.375 ; C14.1 15.375,42.375 ; C6.1 25.65,41.4 v1(26.1,40.95)
  Bottom Layer w0.813: C9.1 C10.1 C10.1@25.05,37.837 ; C11.1 C10.1@25.05,37.837 ; v1(26.4,38.275) 25.969,37.844 25.056,37.844 C10.1@25.05,37.837 ; v1(30.45,41.325) 30.856,41.731 31.769,41.731 31.775,41.738 C4.1 ; v1(30.65,37.075) 31.106,36.619 31.106,35.681 31.113,35.675 C8.1 C7.1
  other v1: 38.725,16.35 38.725,18.84 10.45,20.58 10.45,23.12 38.735,23.951 10.45,25.66 10.45,28.2 38.725,29 10.45,30.74 10.45,33.28 38.725,36.62 38.725,44.24 10.45,45.98 10.45,48.52 38.725,49.32 38.725,51.86 38.725,54.4
  other v2: 32.225,18.55
IN/OUT: C12.2 R1.1 Y2.1 | length 2.5
  Top Layer w0.406: R1.1 C12.2 Y2.1
NetD1_A: D1.A R2.2 | length 2.3
  Top Layer w0.991: D1.A R2.2
NetR1_2: R1.2 U2.6 | length 8
  Top Layer w0.3: R1.2 22.051,33.924 22.051,34.624 21.625,35.05 21.625,38.75 22.15,39.275 U2.6
NRST: C11.2 S1.2 U2.7 | length 14
  Top Layer w0.3: v1@22.706,38.775 U2.7
  Bottom Layer w0.3: S1.2 15.089,36.279 15.089,37.414 18.175,40.5 20.675,40.5 20.681,40.506 21.244,40.506 21.895,39.855 21.895,39.236 22.404,38.727 22.579,38.727 v1@22.591,38.716 ; v1@22.603,38.704 v1@22.591,38.716 ; C11.2 22.9,39.025 v1@22.591,38.716
  other v1: 22.619,38.687
OUT/IN: C13.2 U2.5 Y2.3 | length 8.1
  Top Layer w0.3: C13.2 18.825,40.175 18.925,40.275 18.925,40.625 19.225,40.925 21.55,40.925 22.7,39.775 U2.5
  Top Layer w0.406: Y2.3 C13.2
PA0: P4.13 R27.2 R28.1 U2.10 | length 66
  Top Layer w0.254: R28.1 5.35,45.92 6.295,44.975 10.575,44.975 12.525,43.025 12.525,35.025 13.375,34.175 13.375,30.1 13.9,29.575 13.9,27.775 14.35,27.325 14.35,25.425 14.625,25.15 14.625,23.125 15.35,22.4 15.35,20.597 16.197,19.75 24.05,19.75 24.425,20.125 24.425,33.1 22.275,35.25 22.275,36.132 23.409,37.266 24.341,37.266 U2.10
  Top Layer w0.813: P4.13 R28.1
  Bottom Layer w0.813: P4.13 R27.2
PA1: P4.12 R25.2 R26.1 U2.11 | length 64.1
  Top Layer w0.254: R26.1 5.35,43.38 6.129,42.601 10.674,42.601 12.1,41.175 12.1,34.85 12.95,34 12.95,29.95 13.45,29.45 13.45,27.625 13.925,27.15 13.925,25.275 14.219,24.981 14.219,22.956 14.944,22.231 14.944,20.429 16.047,19.325 24.25,19.325 24.85,19.925 24.85,33.25 22.794,35.306 22.794,36.076 23.484,36.766 24.341,36.766 U2.11
  Top Layer w0.813: P4.12 R26.1
  Bottom Layer w0.813: P4.12 R25.2
PA2: P4.11 R23.2 R24.1 U2.12 | length 61.9
  Top Layer w0.254: R24.1 5.35,40.84 6.129,40.061 10.539,40.061 11.675,38.925 11.675,34.675 12.525,33.825 12.525,29.8 13.025,29.3 13.025,27.45 13.519,26.956 13.519,25.107 13.525,25.1 13.525,25 13.812,24.713 13.812,22.738 14.537,22.013 14.537,20.26 15.898,18.9 24.4,18.9 25.256,19.756 25.256,33.418 23.2,35.474 23.2,35.875 23.6,36.275 U2.12
  Top Layer w0.813: P4.11 R24.1
  Bottom Layer w0.813: P4.11 R23.2
PA3: P4.10 R21.2 R22.1 U2.13 | length 57.5
  Top Layer w0.254: R22.1 5.35,38.3 6.129,37.521 10.529,37.521 11.269,36.781 11.269,34.507 11.275,34.5 ; 11.275,34.5 12.119,33.656 12.119,29.657 12.125,29.65 12.125,29.625 12.619,29.131 12.619,27.282 12.625,27.275 12.625,27.25 13.1,26.775 13.1,24.8 13.406,24.494 13.406,22.569 14.131,21.844 14.131,20.092 15.729,18.494 24.568,18.494 24.575,18.5 24.625,18.5 25.663,19.538 25.663,33.512 25.65,33.524 U2.13
  Top Layer w0.813: P4.10 R22.1
  Bottom Layer w0.813: P4.10 R21.2
PA4: P4.9 R19.2 R20.1 U2.14 | length 56.1
  Top Layer w0.254: R20.1 5.35,35.76 6.16,34.95 10.25,34.95 11.7,33.5 11.7,29.475 12.2,28.975 12.2,27.1 12.675,26.625 12.675,24.65 12.999,24.326 12.999,22.401 13.724,21.676 13.724,19.924 15.623,18.025 24.775,18.025 26.15,19.4 U2.14
  Top Layer w0.813: P4.9 R20.1
  Bottom Layer w0.813: P4.9 R19.2
PA5: P4.8 R17.2 R18.1 U2.15 | length 54.8
  Top Layer w0.254: R18.1 5.35,33.22 6.129,32.441 8.615,32.441 8.619,32.444 10.231,32.444 11.294,31.381 11.294,29.307 11.775,28.826 11.775,26.951 12.256,26.469 12.256,24.494 12.593,24.158 12.593,22.233 13.318,21.508 13.318,19.755 15.473,17.6 24.95,17.6 26.65,19.3 U2.15
  Top Layer w0.813: P4.8 R18.1
  Bottom Layer w0.813: P4.8 R17.2
PA6: P4.7 R15.2 R16.1 U2.16 | length 53.5
  Top Layer w0.254: R16.1 5.35,30.68 6.129,29.901 10.125,29.901 11.325,28.7 11.325,26.825 11.85,26.301 11.85,24.326 12.187,23.989 12.187,22.064 12.912,21.339 12.912,19.587 15.324,17.175 25.2,17.175 27.15,19.125 U2.16
  Top Layer w0.813: P4.7 R16.1
  Bottom Layer w0.813: P4.7 R15.2
PA7: P4.6 R13.2 R14.1 U2.17 | length 52.3
  Top Layer w0.254: R14.1 5.35,28.14 5.92,27.57 5.92,27.455 6.1,27.275 10.301,27.275 11.419,26.157 11.419,24.182 11.78,23.821 11.78,21.896 12.505,21.171 12.505,19.419 15.155,16.769 25.419,16.769 27.65,19 U2.17
  Top Layer w0.813: P4.6 R14.1
  Bottom Layer w0.813: P4.6 R13.2
PA8: P5.5 R39.2 R40.1 U2.29 | length 28.3
  Top Layer w0.254: U2.29 32.459,38.266 33.54,38.266 35.651,36.156 35.651,28.049 38.079,25.621 43.721,25.621 44.5,26.4 R40.1
  Top Layer w0.813: R40.1 P5.5
  Bottom Layer w0.813: R39.2 P5.5
PA9: P5.6 R41.2 R42.1 U2.30 | length 26.4
  Top Layer w0.254: U2.30 32.459,38.766 33.615,38.766 36.057,36.324 36.057,30.043 37.95,28.15 43.71,28.15 44.5,28.94 R42.1
  Top Layer w0.813: R42.1 P5.6
  Bottom Layer w0.813: R41.2 P5.6
PA10: P5.7 R43.2 R44.1 U2.31 | length 24.3
  Top Layer w0.254: U2.31 32.459,39.266 33.69,39.266 36.463,36.493 36.463,32.287 38.05,30.7 43.72,30.7 44.5,31.48 R44.1
  Top Layer w0.813: R44.1 P5.7
  Bottom Layer w0.813: R43.2 P5.7
PA11: P5.8 R45.2 R46.1 U2.32 | length 22.3
  Top Layer w0.254: U2.32 33.756,39.775 36.87,36.661 36.87,34.53 38.171,33.229 43.709,33.229 44.5,34.02 R46.1
  Top Layer w0.813: R46.1 P5.8
  Bottom Layer w0.813: R45.2 P5.8
PA12: P5.9 R47.2 R48.1 U2.33 | length 20.2
  Top Layer w0.254: U2.33 33.83,40.275 38.33,35.775 43.715,35.775 44.5,36.56 R48.1
  Top Layer w0.813: R48.1 P5.9
  Bottom Layer w0.813: R47.2 P5.9
PA14: P5.10 R49.2 R50.1 U2.38 | length 27.4
  Top Layer w0.254: U2.38 30.659,43.084 30.659,45.06 31.198,45.6 34.376,45.6 35.9,44.076 35.9,40.625 38.2,38.325 42.18,38.325 42.184,38.321 43.416,38.321 43.42,38.325 43.725,38.325 44.5,39.1 R50.1
  Top Layer w0.813: R50.1 P5.10
  Bottom Layer w0.813: R49.2 P5.10
PB0: P4.5 R11.2 R12.1 U2.18 | length 51.2
  Top Layer w0.254: R12.1 5.723,25.277 5.723,24.905 5.853,24.775 10.251,24.775 11.374,23.653 11.374,21.701 12.099,20.976 12.099,19.25 15.049,16.3 25.55,16.3 28.15,18.9 U2.18
  Top Layer w0.813: P4.5 R12.1
  Bottom Layer w0.813: P4.5 R11.2
PB1: P4.4 R9.2 R10.1 U2.19 | length 49.8
  Top Layer w0.254: R10.1 5.35,23.06 6.16,22.25 10.25,22.25 11.692,20.808 11.692,19.082 14.924,15.85 25.75,15.85 28.65,18.75 U2.19
  Top Layer w0.813: P4.4 R10.1
  Bottom Layer w0.813: P4.4 R9.2
PB2: P4.3 R7.2 R8.1 U2.20 | length 46.2
  Top Layer w0.254: R8.1 5.35,20.52 6.145,19.725 10.475,19.725 14.775,15.425 25.975,15.425 29.15,18.6 U2.20
  Bottom Layer w0.813: P4.3 R7.2
PB3: P5.11 R51.2 R52.1 U2.39 | length 26.1
  Top Layer w0.254: U2.39 30.15,45.126 30.855,45.831 31.03,46.006 34.544,46.006 36.4,44.151 36.4,42.65 38.2,40.85 43.71,40.85 44.5,41.64 R52.1
  Top Layer w0.813: R52.1 P5.11
  Bottom Layer w0.813: R51.2 P5.11
PB4: P5.12 R53.2 R54.1 U2.40 | length 25
  Top Layer w0.254: U2.40 29.659,43.084 29.659,45.21 30.687,46.238 30.862,46.413 34.712,46.413 37.748,43.377 43.697,43.377 44.5,44.18 R54.1
  Top Layer w0.813: R54.1 P5.12
  Bottom Layer w0.813: R53.2 P5.12
PB5: P5.13 R55.2 R56.1 U2.41 | length 24.8
  Top Layer w0.254: U2.41 29.15,45.276 30.693,46.819 34.881,46.819 35.759,45.941 43.721,45.941 44.5,46.72 R56.1
  Top Layer w0.813: R56.1 P5.13
  Bottom Layer w0.813: R55.2 P5.13
PB6: P5.14 R57.2 R58.1 U2.42 | length 25.7
  Top Layer w0.254: U2.42 28.65,45.351 30.525,47.226 35.326,47.226 36.575,48.475 43.715,48.475 44.5,49.26 R58.1
  Top Layer w0.813: R58.1 P5.14
  Bottom Layer w0.813: R57.2 P5.14
PB7: P5.15 R59.2 R60.1 U2.43 | length 27.3
  Top Layer w0.254: U2.43 28.159,43.084 28.159,44.504 28.208,44.554 28.208,44.996 28.159,45.046 28.159,45.434 30.357,47.632 35.157,47.632 38.525,51 43.7,51 44.5,51.8 R60.1
  Top Layer w0.813: R60.1 P5.15
  Bottom Layer w0.813: R59.2 P5.15
PB8: P5.16 R61.2 R62.1 U2.45 | length 30.1
  Top Layer w0.254: U2.45 27.159,43.084 27.159,44.537 27.142,44.554 27.142,44.996 27.454,45.308 27.458,45.308 30.188,48.038 34.989,48.038 35.6,48.649 35.6,50.375 38.75,53.525 43.685,53.525 44.5,54.34 R62.1
  Top Layer w0.813: R62.1 P5.16
  Bottom Layer w0.813: R61.2 P5.16
PB9: P4.14 R29.2 R30.1 U2.46 | length 29.6
  Top Layer w0.254: R30.1 5.35,48.46 6.26,47.55 11.275,47.55 12.575,46.25 25.3,46.25 26.65,44.9 U2.46
  Top Layer w0.813: P4.14 R30.1
  Bottom Layer w0.813: P4.14 R29.2
PB10: P4.2 R5.2 R6.1 U2.21 | length 48.6
  Top Layer w0.254: R6.1 5.35,17.98 6.255,17.075 12.55,17.075 14.65,14.975 26.175,14.975 29.65,18.45 U2.21
  Top Layer w0.813: P4.2 R6.1
  Bottom Layer w0.813: P4.2 R5.2
PB11: P4.1 R3.2 R4.1 U2.22 | length 48.7
  Top Layer w0.254: R4.1 5.658,15.182 5.658,14.717 5.825,14.55 26.375,14.55 30.15,18.325 U2.22
  Top Layer w0.813: P4.1 R4.1
  Bottom Layer w0.813: P4.1 R3.2
PB12: P5.1 R31.2 R32.1 U2.25 | length 36.3
  Top Layer w0.254: U2.25 33.2,36.275 34.025,35.45 34.025,19.525 38.089,15.461 43.721,15.461 44.5,16.24 R32.1
  Top Layer w0.813: R32.1 P5.1
  Bottom Layer w0.813: R31.2 P5.1
PB13: P5.2 R33.2 R34.1 U2.26 | length 34.4
  Top Layer w0.254: U2.26 32.459,36.766 33.316,36.766 34.431,35.651 34.431,21.544 37.992,17.983 43.703,17.983 44.5,18.78 R34.1
  Top Layer w0.813: R34.1 P5.2
  Bottom Layer w0.813: R33.2 P5.2
PB14: P5.3 R35.2 R36.1 U2.27 | length 32.3
  Top Layer w0.254: U2.27 32.459,37.266 33.391,37.266 34.838,35.819 34.838,23.812 38.109,20.541 43.721,20.541 44.5,21.32 R36.1
  Top Layer w0.813: R36.1 P5.3
  Bottom Layer w0.813: R35.2 P5.3
PB15: P5.4 R37.2 R38.1 U2.28 | length 30.3
  Top Layer w0.254: U2.28 32.459,37.766 33.466,37.766 35.244,35.988 35.244,25.881 38.044,23.081 43.721,23.081 44.5,23.86 R38.1
  Top Layer w0.813: R38.1 P5.4
  Bottom Layer w0.813: R37.2 P5.4
SWCLK: P2.3 U2.37 | length 8.5
  Top Layer w0.254: v1(28.375,47.55) 30.075,49.25 P2.3 ; U2.37 31.15,44.675 v1(31.35,44.875)
  Bottom Layer w0.254: v1(28.375,47.55) 31.001,44.924 31.301,44.924 v1(31.35,44.875)
SWDIO: P2.2 U2.34 | length 16.8
  Top Layer w0.254: P2.2 31.441,49.446 31.441,49.991 32.025,50.575 33.625,50.575 34.475,49.725 v1(34.475,48.725) ; U2.34 34.575,40.775 35.3,41.5 35.3,43.175 v1(33.525,44.95)
  Bottom Layer w0.254: v1(33.525,44.95) 33.525,47.775 v1(34.475,48.725)
pads on no net: U2.1 U2.2

## Polygon pours and split planes (outlines as drawn)
GND on Bottom Layer "GND_L04_P001" (solid, remove dead copper, pour order 1): 0,12.325 0,62.23 50.275,62.23 50.275,12.325
GND on Top Layer "GND_L01_P000" (solid, remove dead copper, pour order 0): 0,12.325 0,62.23 50.275,62.23 50.275,12.325
+3.3V on 3.3V_layer (split plane): 49.765,12.835 0.51,12.835 0.51,61.72 49.765,61.72
GND on GND_layer (split plane): 49.765,12.835 0.51,12.835 0.51,61.72 49.765,61.72

## Keep-outs
Keep-Out Layer:
  the board outline again, w0.813

## Silkscreen, mask and mechanical layers (free items; w line width, h text height)
Top Overlay:
  text "GND" at 3.962,60.692 h1
  text "3.3V" at 3.954,54.967 h1
  text "PB8" at 40.16,54.09 h1
  text "PB7" at 40.171,51.537 h1
  text "3.3V" at 24.108,50.862 h1 r90
  text "BOOT0" at 25.603,50.862 h1 r90
  text "GND" at 27.103,50.862 h1 r90
  text "GND" at 28.858,50.862 h1 r90
  text "SWCLK" at 30.265,50.862 h1 r90
  text "SWDIO" at 31.674,50.862 h1 r90
  text "3.3V" at 33.083,50.862 h1 r90
  text "PB6" at 40.161,49.01 h1
  text "PB9" at 8.154,48.184 h1
  text "PB5" at 40.172,46.476 h1
  text "PA0" at 8.154,45.651 h1
  text "PB4" at 40.15,43.93 h1
  text "PA1" at 8.154,43.103 h1
  text "PB3" at 40.173,41.389 h1
  text "PA2" at 8.154,40.551 h1
  text "PA14" at 39.624,38.85 h1
  text "PA3" at 8.154,38.036 h1
  text "PA12" at 39.632,36.304 h1
  text "PA4" at 8.154,35.48 h1
  text "PA11" at 39.658,33.769 h1
  text "PA5" at 8.154,32.957 h1
  text "PA10" at 39.639,31.229 h1
  text "PA6" at 8.154,30.404 h1
  text "PA9" at 40.174,28.689 h1
  text "PA7" at 8.154,27.852 h1
  text "PA8" at 40.161,26.15 h1
  text "PB0" at 8.154,25.324 h1
  text "PB15" at 39.645,23.615 h1
  text "PB1" at 8.154,22.777 h1
  text "PB14" at 39.623,21.07 h1
  text "PB2" at 8.154,20.204 h1
  text "PB13" at 39.646,18.529 h1
  text "PB10" at 8.154,17.692 h1
  text "PB12" at 39.631,15.984 h1
  text "PB11" at 8.154,15.159 h1

## Dimensions
50.275,62.23 to 50.275,12.325 on Mechanical 15
0,12.325 to 50.275,12.325 on Mechanical 15